# Altium PCB BMS_Rev4.PcbDoc (part 2 of 3)
Units mm, origin at the board's own origin, x right, y up, seen from the top; angles counter-clockwise.
Board outline 63.88 x 34.7 mm, 2 copper layers (Top Layer, Bottom Layer); 62 components, 39 nets, 215 pads, 192 vias.
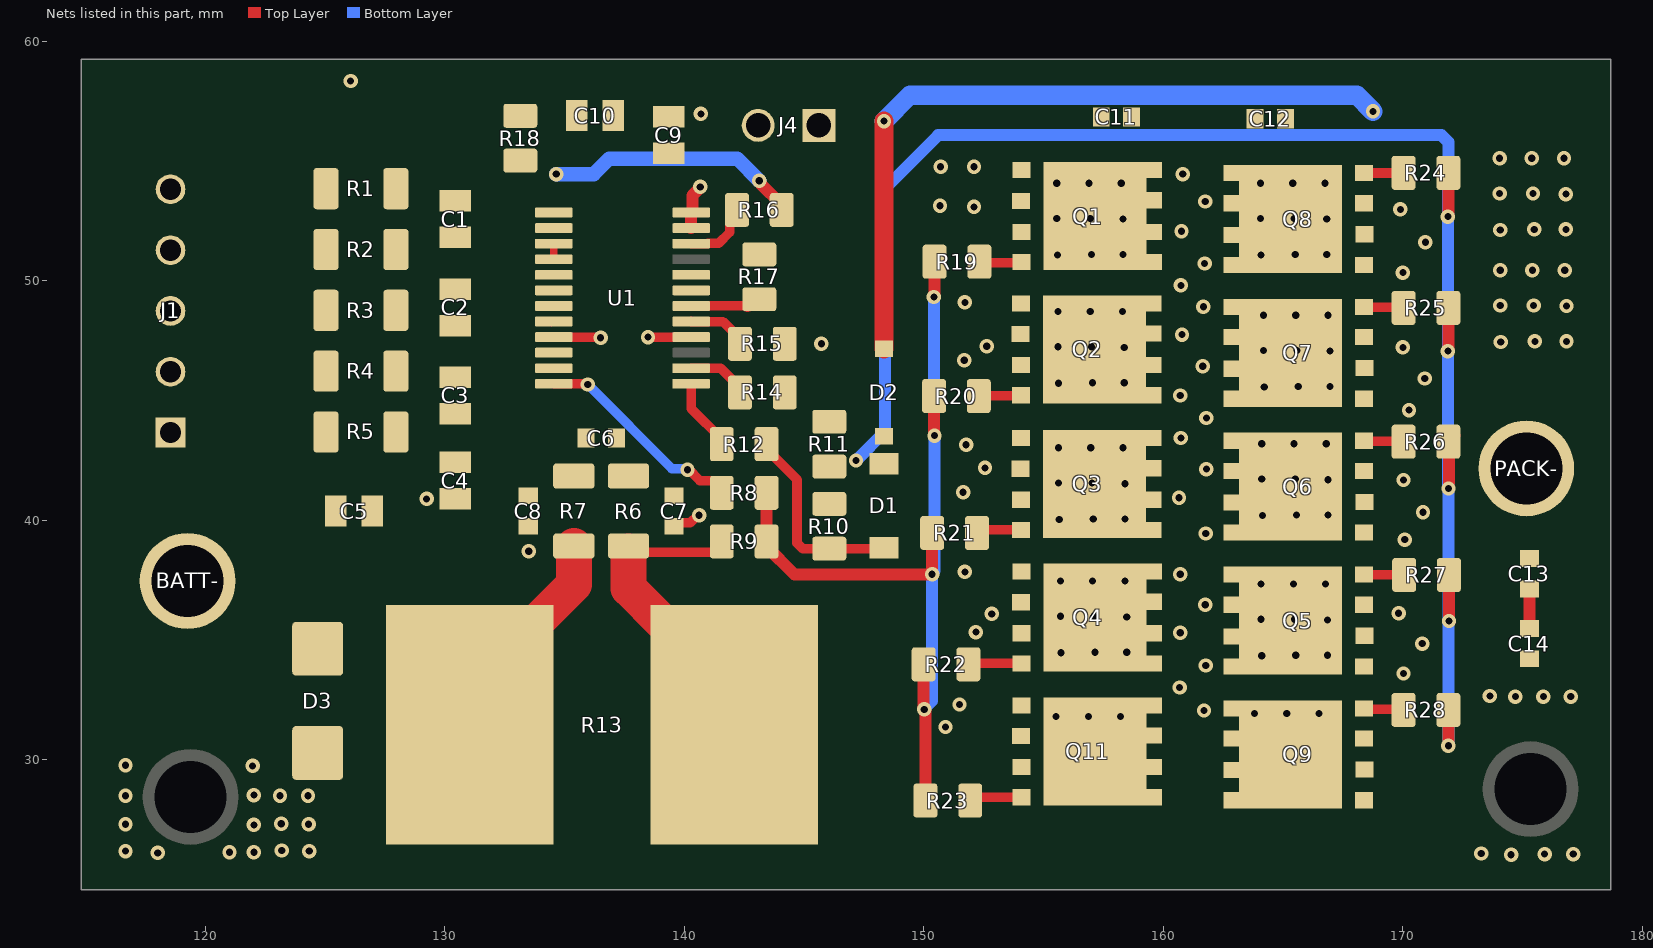
[diagram p2: the nets of this part, all layers, seen from the top]

## Components (designator, comment, footprint, x,y, rotation, side; value= is the part's Value field where it differs from the comment) (continued)
R4 "100R" RESC3115X65N 126.492,46.228 r0 top (schematic designator R5)
R5 "100R" RESC3115X65N 126.492,43.688 r0 top (schematic designator R19)
R6 "100R" RESC3115X65N 137.668,40.386 r90 top
R7 "100R" RESC3115X65N 135.382,40.386 r90 top
R8 "5.1K" RESISTOR0805 142.494,41.148 r180 top value=5.1kR
R9 "10M" RESISTOR0805 142.494,39.116 r0 top
R10 "1M" RESISTOR0805 146.05,39.751 r270 top value=1MR
R11 "3M" RESISTOR0805 146.05,43.18 r270 top value=3MR
R12 "5.1K" RESISTOR0805 142.494,43.18 r0 top value=5.1kR
R13 "0.2mOhm,7W" CSR 136.627,31.725 r0 top value=0.2mR
R14 "470K" RESISTOR0805 143.256,45.339 r180 top value=47kR
R15 "750K" RESISTOR0805 143.256,47.371 r0 top value=750kR
R16 "10K" RESISTOR0805 143.129,52.959 r0 top value=10kR
R17 "10K" RESISTOR0805 143.129,50.165 r90 top value=10kR
R18 "1K" RESISTOR0805 133.147,55.956 r90 top value=10kR
R19 "120R" RESISTOR0805 151.384,50.8 r0 top (schematic designator R31)
R20 "120R" RESISTOR0805 151.359,45.187 r0 top
R21 "120R" RESISTOR0805 151.282,39.472 r0 top
R22 "120R" RESISTOR0805 150.927,33.985 r0 top
R23 "120R" RESISTOR0805 151.003,28.296 r0 top
R24 "120R" RESISTOR0805 170.967,54.508 r0 top (schematic designator R25)
R25 "120R" RESISTOR0805 170.967,48.87 r0 top (schematic designator R26)
R26 "120R" RESISTOR0805 170.967,43.282 r0 top (schematic designator R27)
R27 "120R" RESISTOR0805 170.993,37.719 r0 top (schematic designator R28)
R28 "120R" RESISTOR0805 170.967,32.08 r0 top (schematic designator R29)
U1 "BQ7791501PWR" BQ77915 137.414,49.276 r0 top

## Footprints (in the part's own frame and the unit in brackets; to place one, negate y for a bottom-side part, rotate by r counter-clockwise, add the part's x,y. Pads: shape width x height; smd on the part's side, far side on the other; paste and mask are expansions set on the pad)
"6 pin header" [mm]
  rect 1.24x1.24 hole 0.89: J1_1(0,0)
  round 1.24 hole 0.89: J1_2(2.54,0) J1_3(5.08,0) J1_4(7.62,0) J1_5(10.16,0)
  silkscreen extent -2.1,-1.2 12.45,1.2, body extent -2.37,-2.35 12.53,3.4, height 6.51
BQ77915 [mm]
  rrect25% 1.57x0.41 smd: 1(-2.87,3.575) 2(-2.87,2.925) 3(-2.87,2.275) 4(-2.87,1.625) 5(-2.87,0.975) 6(-2.87,0.325) 7(-2.87,-0.325) 8(-2.87,-0.975) 9(-2.87,-1.625) 10(-2.87,-2.275) 11(-2.87,-2.925) 12(-2.87,-3.575) 13(2.87,-3.575) 14(2.87,-2.925) 15(2.87,-2.275) 16(2.87,-1.625) 17(2.87,-0.975) 18(2.87,-0.325) 19(2.87,0.325) 20(2.87,0.975) 21(2.87,1.625) 22(2.87,2.275) 23(2.87,2.925) 24(2.87,3.575)
  silkscreen extent -4.54,-4.1 2.2,4.1, body extent -3.2,-3.9 3.2,3.9, height 1.2
CSR [mm]
  rect 7x10 smd: 1(-5.588,-0.254) 2(5.461,-0.254)
  body extent -7.75,-4 7.49,4, height 1.45
DIODE(SOD) [mm]
  rect 0.9x1.2 smd: 1(-1.778,0) 2(1.725,0)
  silkscreen extent -2.12,-1 1.4,1.05, body extent -1.78,-0.9 1.82,0.9, height 1.11
DIOM5336X250N [mm]
  rrect15% 2.25x2.13 smd: 1(-2.175,0) 2(2.175,0)
  silkscreen extent -4.4,-1.45 2.65,1.45, body extent -2.65,-1.81 2.65,1.81, height 2.5
HEADER(4PIN) [mm]
  rect 1.37x1.37 / inner round 1.37 / far side rect 1.37x1.37 hole 1.02: 01(1.143,0)
  round 1.37 hole 1.02: 02(-1.397,0)
  silkscreen extent -2.67,-1.27 3.16,1.27, body extent -2.67,-1.35 2.41,1.14, height 11.32
MOSFET_CSD19531Q5A [mm]
  rect 4.295x4.51 smd paste-3: 9(0.301,0)
  rect 0.655x0.675 smd paste-1: D(2.776,-1.917) D(2.776,-0.66) D(2.776,0.66) D(2.776,1.917)
  rect 0.75x0.675 smd paste-1: G(-2.776,-1.917) S(-2.794,0.635) S(-2.776,-0.66) S(-2.776,1.917)
  silkscreen extent -3.63,1.87 -3.53,1.97, body extent -3,-2.36 3,2.54, height 1.11
PADSPACK#1 [mm]
  round 4 hole 3: BATT+(-1.27,-0.381)
PADSPACK#2 [mm]
  round 4 hole 3: 4(-1.27,-0.381)
RESC3115X65N [mm]
  rrect25% 1.05x1.72 smd: 1(-1.46,0) 2(1.46,0)
  body extent -1.6,-0.67 1.6,0.92, height 1
RESISTOR0805 [mm]
  rrect25% 1x1.42 smd: 1(-0.935,0) 2(0.935,0)
  silkscreen extent -0.12,-0.63 0.12,0.63, body extent -1,-0.63 1,0.63, height 0.65
WCAP-CSGP_0603_L1.6W0.8H0.8_WAVE [mm] "Ceramic Capacitors, 0603, body 1.6x0.8mm"
  rect 0.7x0.8 smd: 1(-0.635,0) 2(0.635,0)
  body extent -0.8,-0.4 0.8,0.4, height 0.8
WCAP-CSGP_0805_L2W1.25H0.6_WAVE [mm] "Ceramic Capacitors, body 2x1.25mm"
  rect 0.9x1.3 smd: 1(-0.762,0) 2(0.762,0)
  body extent -1,-0.63 1,0.63, height 0.6
ZENER(SOD123) [mm] "SODFL, 2-Leads, Body 1.60x3.71mm, IPC Medium Density"
  rect 0.7x0.75 smd: 1(-1.825,0) 2(1.825,0)
  silkscreen extent -2.12,-0.9 1.4,0.9, body extent -1.93,-0.9 1.93,0.9, height 1.35

## Part data
C1 C2 C3 C4 C5 C9 C10: library part C1u0805, "Ceramic Capacitor, Multilayer, Ceramic, 16V, 10% +Tol, 10% -Tol, X7R, 15% TC, 1uF, Surface Mount, 0805", Capacitor Type=Ceramic, Case/Package=0805, Manufacturer="Walsin Technologies", Manufacturer Part Number=0805B105K160CT, Max Operating Temperature=125°C, Min Operating Temperature=-55°C, Package Shape=Rectangular, Package Style=SMTMeter, Rated DC Voltage (URdc)=16V, Supplier Part Number=1292-0805B105K160CT-ND, Temperature Characteristics Code=X7R, Tolerance  (fill in as +-)=10%, Category="Ceramic Capacitors", ComponentLink1Description=https://datasheet.ciiva.com:443/pdfs/VipMasterIC/IC/WATC/WATC-S-A0009550342/WATC-S-A0009550342-1.pdf?src-supplier=IHS+Markit, ComponentLink1URL=https://datasheet.ciiva.com:443/pdfs/VipMasterIC/IC/WATC/WATC-S-A0009550342/WATC-S-A0009550342-1.pdf?src-supplier=IHS+Markit, ComponentLink2Description=http://www.farnell.com/datasheets/2340522.pdf?src-supplier=Farnell, ComponentLink2URL=http://www.farnell.com/datasheets/2340522.pdf?src-supplier=Farnell, ComponentLink3Description=https://datasheet.octopart.com/0805B105K160CT-Walsin-Technologies-datasheet-128065749.pdf?src-supplier=Future+Electronics, ComponentLink3URL=https://datasheet.octopart.com/0805B105K160CT-Walsin-Technologies-datasheet-128065749.pdf?src-supplier=Future+Electronics, ComponentLink4Description=https://datasheet.octopart.com/0805B105K160CT-Walsin-Technologies-datasheet-85392065.pdf?src-supplier=Element14, ComponentLink4URL=https://datasheet.octopart.com/0805B105K160CT-Walsin-Technologies-datasheet-85392065.pdf?src-supplier=Element14, ComponentLink5Description=https://www.verical.com/server-webapp/html/getDatasheet?partID=137112&src-supplier=Verical, ComponentLink5URL=https://www.verical.com/server-webapp/html/getDatasheet?partID=137112&src-supplier=Verical, ComponentLink6Description=https://datasheet.octopart.com/0805B105K160CT-Walsin-Technologies-datasheet-62066062.pdf?src-supplier=TME, ComponentLink6URL=https://datasheet.octopart.com/0805B105K160CT-Walsin-Technologies-datasheet-62066062.pdf?src-supplier=TME, ComponentLink7Description=https://datasheet.octopart.com/0805B105K160CT-Walsin-Technologies-datasheet-136037192.pdf?src-supplier=TECHDesign, ComponentLink7URL=https://datasheet.octopart.com/0805B105K160CT-Walsin-Technologies-datasheet-136037192.pdf?src-supplier=TECHDesign, Dielectric Material=Ceramic, Height=1.25mm, JESD-609 Code=e3, Length=2mm, Mounting Technology="Surface Mount", Multilayer=Yes, Packaging="Tape and Reel", Pins=2, Pricing="1=0.1, 10=0.05, 100=0.0295, 1000=0.01909 (USD)", Reach SVHC Compliant=Yes, RoHS=Yes, RoHS Compliant=Yes, Stock=4261, Supplier=Digikey, Terminal Finish=Nickel, Termination=Wraparound, Tolerance (fill in as +-)=10%, Width=1.25mm
C6 C7 C8 C11 C12 C13 C14: library part C0.1uF0603, "Ceramic Capacitor, Multilayer, Ceramic, 16V, 10% +Tol, 10% -Tol, X7R, 15% TC, 0.1uF, Surface Mount, 0603", Capacitor Type=Ceramic, Case/Package=0603, Manufacturer=Yageo, Manufacturer Part Number=CC0603KRX7R7BB104, Max Operating Temperature=125°C, Min Operating Temperature=-55°C, Package Shape=Rectangular, Package Style=SMTMeter, Rated DC Voltage (URdc)=16V, Supplier Part Number=2938116, Temperature Characteristics Code=X7R, Tolerance  (fill in as +-)=10%, Category="Ceramic Capacitors", ComponentLink1Description=https://datasheet.ciiva.com:443/pdfs/VipMasterIC/IC/YAGO/YAGO-S-A0003557223/YAGO-S-A0003557223-1.pdf?src-supplier=IHS+Markit, ComponentLink1URL=https://datasheet.ciiva.com:443/pdfs/VipMasterIC/IC/YAGO/YAGO-S-A0003557223/YAGO-S-A0003557223-1.pdf?src-supplier=IHS+Markit, ComponentLink2Description=https://datasheet.ciiva.com/11786/0900766b80d84f1d-11786077.pdf?src-supplier=Rs, ComponentLink2URL=https://datasheet.ciiva.com/11786/0900766b80d84f1d-11786077.pdf?src-supplier=Rs, ComponentLink3Description=https://datasheet.ciiva.com/8033/70765-8033799.pdf?src-supplier=Element14, ComponentLink3URL=https://datasheet.ciiva.com/8033/70765-8033799.pdf?src-supplier=Element14, ComponentLink4Description=https://datasheet.ciiva.com/7978/1489800-7978141.pdf?src-supplier=Element14, ComponentLink4URL=https://datasheet.ciiva.com/7978/1489800-7978141.pdf?src-supplier=Element14, ComponentLink5Description=https://datasheet.ciiva.com/28450/1489800-28450552.pdf?src-supplier=Element14, ComponentLink5URL=https://datasheet.ciiva.com/28450/1489800-28450552.pdf?src-supplier=Element14, ComponentLink6Description=https://datasheet.ciiva.com/46430/1734573-46430156.pdf?src-supplier=Element14, ComponentLink6URL=https://datasheet.ciiva.com/46430/1734573-46430156.pdf?src-supplier=Element14, ComponentLink7Description=https://datasheet.ciiva.com/144/mlccorderingcode-144183.pdf?src-supplier=Digikey, ComponentLink7URL=https://datasheet.ciiva.com/144/mlccorderingcode-144183.pdf?src-supplier=Digikey, ComponentLink8Description=https://datasheet.ciiva.com/144/mlccorderingcode-144182.pdf?src-supplier=Digikey, ComponentLink8URL=https://datasheet.ciiva.com/144/mlccorderingcode-144182.pdf?src-supplier=Digikey, ComponentLink9Description=https://datasheet.ciiva.com/144/mlccorderingcode-144184.pdf?src-supplier=Digikey, ComponentLink9URL=https://datasheet.ciiva.com/144/mlccorderingcode-144184.pdf?src-supplier=Digikey, ComponentLink10Description=https://datasheet.ciiva.com/8033/1734573-8033797.pdf?src-supplier=Element14, ComponentLink10URL=https://datasheet.ciiva.com/8033/1734573-8033797.pdf?src-supplier=Element14, ComponentLink11Description=https://datasheet.ciiva.com/13395/upy-gphc-x7r-6-3v-to-50v-8-13395674.pdf?src-supplier=Mouser, ComponentLink11URL=https://datasheet.ciiva.com/13395/upy-gphc-x7r-6-3v-to-50v-8-13395674.pdf?src-supplier=Mouser, ComponentLink12Description=https://datasheet.ciiva.com/11464/upy-gphc-x7r-6-3v-to-50v-8-11464735.pdf?src-supplier=Avnet, ComponentLink12URL=https://datasheet.ciiva.com/11464/upy-gphc-x7r-6-3v-to-50v-8-11464735.pdf?src-supplier=Avnet, ComponentLink13Description=https://datasheet.ciiva.com/15165/getdatasheetpartid-63554-15165387.pdf?src-supplier=Verical, ComponentLink13URL=https://datasheet.ciiva.com/15165/getdatasheetpartid-63554-15165387.pdf?src-supplier=Verical, Dielectric Material=Ceramic, Height=0.8mm, JESD-609 Code=e3, Length=1.6mm, Mounting Technology="Surface Mount", Multilayer=Yes, Packaging="Tape and Reel", Pins=2, Pricing="4000=0.0024, 16000=0.0023, 40000=0.0022, 100000=0.0022, 160000=0.0021 (USD)", Reach SVHC Compliant=Yes, RoHS=Yes, RoHS Compliant=Yes, Stock=532000, Supplier="Future Electronics", Terminal Finish=Nickel, Termination=Wraparound, Tolerance (fill in as +-)=10%, Width=0.8mm
D1: library part 1N4007SOD123, "Standard Rectifier 1000V SOD-123", Manufacturer="Sangdest Microelectronics", Manufacturer Part Number=1N4007FL, Category="Rectifier Diodes", Pricing="1=0.13, 10=0.08, 100=0.0493, 500=0.03562, 1000=0.03116 (USD)", RoHS=No, Stock=340272, Supplier=Digikey, Supplier Part Number=1655-1N4007FLCT-ND
D2: library part Zener16V, "Zener Diode, 16V V(Z), 5%, 0.5W, Silicon, Unidirectional", Manufacturer="ON Semiconductor", Max Operating Temperature=150°C, Max Power Dissipation=500mW, Min Operating Temperature=-55°C, Package Body Material=Plastic, Package Shape=Rectangular, Package Style="SMALL OUTLINEMeter", Reference Voltage-Nom=16V, Test Current=7.8mA, Voltage Tol-Max=5%, Category="Zener Diodes", ComponentLink1Description=https://datasheet.ciiva.com:443/pdfs/VipMasterIC/IC/ONSM/ONSM-S-A0008364085/ONSM-S-A0008364085-1.pdf?src-supplier=IHS+Markit, ComponentLink1URL=https://datasheet.ciiva.com:443/pdfs/VipMasterIC/IC/ONSM/ONSM-S-A0008364085/ONSM-S-A0008364085-1.pdf?src-supplier=IHS+Markit, ComponentLink2Description=https://datasheet.ciiva.com/10638/mmsz5221bt1-d-10638284.pdf?src-supplier=Avnet, ComponentLink2URL=https://datasheet.ciiva.com/10638/mmsz5221bt1-d-10638284.pdf?src-supplier=Avnet, ComponentLink3Description=https://datasheet.ciiva.com/900/mmsz5221bt1-d-900242.pdf?src-supplier=Digikey, ComponentLink3URL=https://datasheet.ciiva.com/900/mmsz5221bt1-d-900242.pdf?src-supplier=Digikey, Diode Element Material=SILICON, Diode Type=ZENER, Dynamic Impedance-Max=17R, JESD-30 Code=R-PDSO-G2, JESD-609 Code=e3, Manufacturer Part Number=SZMMSZ5246BT1G, Moisture Sensitivity Level=1, Number of Elements=1, Pins=2, Polarity=Unidirectional, Pricing="1=0.126, 10=0.0807, 100=0.0626, 500=0.0611, 1000=0.0597, 3000=0.0399, 6000=0.0386 (USD)", Reach SVHC Compliant=Yes, Reference Standard=AEC-Q101, RoHS=Yes, RoHS Compliant=Yes, Stock=21000, Supplier="Arrow Electronics", Supplier Part Number=SZMMSZ5246BT1G, Surface Mount=Yes, Technology=ZENER, Terminal Finish=Tin, Terminal Form="Gull Wing", Terminal Position=DUAL
D3: library part Diode(26V), "Trans Voltage Suppressor Diode, 600W, 26V V(RWM), Unidirectional, 1 Element, Silicon", Breakdown Voltage-Nom=31.05V, Clamping Voltage-Max=42.1V, Manufacturer=Diodes, Manufacturer Part Number=SMBJ26A-13-F, Max Breakdown Voltage=33.2V, Max Operating Temperature=150°C, Max Power Dissipation=5W, Min Breakdown Voltage=28.9V, Min Operating Temperature=-55°C, Non-rep Peak Rev Power Dis-Max=600W, Package Body Material=Plastic, Package Shape=Rectangular, Package Style="SMALL OUTLINEMeter", Peak Reflow Temperature (Cel)=260°C, Rep Pk Reverse Voltage-Max=26V, Time @ Peak Reflow Temperature-Max (s)=40s, Additional Feature="EXCELLENT CLAMPING CAPABILITY", Category="TVS Diodes", ComponentLink1Description=https://datasheet.ciiva.com:443/pdfs/VipMasterIC/IC/DIOD/DIOD-S-A0003133144/DIOD-S-A0003133144-1.pdf?src-supplier=IHS+Markit, ComponentLink1URL=https://datasheet.ciiva.com:443/pdfs/VipMasterIC/IC/DIOD/DIOD-S-A0003133144/DIOD-S-A0003133144-1.pdf?src-supplier=IHS+Markit, ComponentLink2Description=http://www.mouser.com/ds/2/115/ds19002-13254.pdf?src-supplier=Mouser, ComponentLink2URL=http://www.mouser.com/ds/2/115/ds19002-13254.pdf?src-supplier=Mouser, ComponentLink3Description=https://datasheet.octopart.com/SMBJ26A-13-F-Diodes-Inc.-datasheet-4062.pdf?src-supplier=Digikey, ComponentLink3URL=https://datasheet.octopart.com/SMBJ26A-13-F-Diodes-Inc.-datasheet-4062.pdf?src-supplier=Digikey, ComponentLink4Description=https://www.diodes.com/assets/Datasheets/ds19002.pdf?src-supplier=Digikey, ComponentLink4URL=https://www.diodes.com/assets/Datasheets/ds19002.pdf?src-supplier=Digikey, ComponentLink5Description=http://components.arrow.com/part/dataview/41509992S7614743N2867?src-supplier=Arrow+Electronics, ComponentLink5URL=http://components.arrow.com/part/dataview/41509992S7614743N2867?src-supplier=Arrow+Electronics, ComponentLink6Description=http://www.diodes.com//datasheets/ds19002.pdf?src-supplier=Avnet, ComponentLink6URL=http://www.diodes.com//datasheets/ds19002.pdf?src-supplier=Avnet, ComponentLink7Description=http://www.diodes.com///datasheets/ds19002.pdf?src-supplier=Avnet, ComponentLink7URL=http://www.diodes.com///datasheets/ds19002.pdf?src-supplier=Avnet, ComponentLink8Description=https://datasheet.octopart.com/SMBJ26A-13-F-Diodes-Inc.-datasheet-103923734.pdf?src-supplier=Farnell, ComponentLink8URL=https://datasheet.octopart.com/SMBJ26A-13-F-Diodes-Inc.-datasheet-103923734.pdf?src-supplier=Farnell, Diode Element Material=SILICON, Diode Type="TRANS VOLTAGE SUPPRESSOR", JESD-30 Code=R-PDSO-C2, JESD-609 Code=e3, Moisture Sensitivity Level=1, Number of Elements=1, Pins=2, Polarity=Unidirectional, Pricing="43=0.1066 (USD)", Qualification Status="Not Qualified", Reach SVHC Compliant=No, RoHS=Yes, RoHS Compliant=Yes, Stock=43, Supplier="Arrow Electronics", Supplier Part Number=SMBJ26A-13-F, Surface Mount=Yes, Technology=AVALANCHE, Terminal Finish=Tin, Terminal Form="C BEND", Terminal Position=DUAL
J4: library part Header(4Pin)
Q1 Q2 Q3 Q4 Q5 Q6 Q7 Q8 Q9 Q11: library part "Power Mosfet", "Power Field-Effect Transistor, 100A I(D), 30V, 0.0078ohm, 1-Element, N-Channel, Silicon, Metal-oxide Semiconductor FET", Avalanche Energy Rating (Eas)=168mJ, Case Connection=DRAIN, Drain Current-Max (Abs) (ID)=100A, Drain-source On Resistance-Max=7.8mR, DS Breakdown Voltage-Min=30V, Manufacturer="Texas Instruments", Max Operating Temperature=150°C, Operating Mode="ENHANCEMENT MODE", Package Body Material=Plastic, Package Shape=Rectangular, Package Style="SMALL OUTLINEMeter", Peak Reflow Temperature (Cel)=260°C, Power Dissipation-Max (Abs)=3.1W, Pulsed Drain Current-Max (IDM)=134A, Supplier Part Number=595-CSD17310Q5A, Category="Integrated Circuits (ICs)", ComponentLink1Description=https://www.ti.com:443/lit/ds/symlink/csd17310q5a.pdf?src-supplier=IHS+Markit, ComponentLink1URL=https://www.ti.com:443/lit/ds/symlink/csd17310q5a.pdf?src-supplier=IHS+Markit, ComponentLink2Description=https://datasheet.ciiva.com/938/csd17310q5a-938736.pdf?src-supplier=Digikey, ComponentLink2URL=https://datasheet.ciiva.com/938/csd17310q5a-938736.pdf?src-supplier=Digikey, ComponentLink3Description=https://datasheet.ciiva.com/14423/slps255a-14423506.pdf?src-supplier=Avnet, ComponentLink3URL=https://datasheet.ciiva.com/14423/slps255a-14423506.pdf?src-supplier=Avnet, ComponentLink4Description=https://datasheet.ciiva.com/4440/slps255a-128076-4440500.pdf?src-supplier=Mouser, ComponentLink4URL=https://datasheet.ciiva.com/4440/slps255a-128076-4440500.pdf?src-supplier=Mouser, ComponentLink5Description=https://datasheet.ciiva.com/7968/1788987-7968276.pdf?src-supplier=Element14, ComponentLink5URL=https://datasheet.ciiva.com/7968/1788987-7968276.pdf?src-supplier=Element14, ComponentLink6Description=https://datasheet.ciiva.com/938/csd17310q5a-938737.pdf?src-supplier=Digikey, ComponentLink6URL=https://datasheet.ciiva.com/938/csd17310q5a-938737.pdf?src-supplier=Digikey, ComponentLink7Description=https://datasheet.ciiva.com/938/csd17310q5a-938738.pdf?src-supplier=Digikey, ComponentLink7URL=https://datasheet.ciiva.com/938/csd17310q5a-938738.pdf?src-supplier=Digikey, ComponentLink8Description=https://datasheet.ciiva.com/5751/csd17310q5a-5751786.pdf?src-supplier=Farnell, ComponentLink8URL=https://datasheet.ciiva.com/5751/csd17310q5a-5751786.pdf?src-supplier=Farnell, ComponentLink9Description=https://datasheet.ciiva.com/14192/slps255a-14192902.pdf?src-supplier=Avnet, ComponentLink9URL=https://datasheet.ciiva.com/14192/slps255a-14192902.pdf?src-supplier=Avnet, Drain Current-Max (ID)=100A, FET Technology="METAL-OXIDE SEMICONDUCTOR", JESD-609 Code=e3, Manufacturer Part Number=CSD17310Q5A, Moisture Sensitivity Level=1, Number of Elements=1, Pins=5, Polarity/Channel Type=N-CHANNEL, Pricing="1=0.55, 10=0.537, 50=0.537, 100=0.478, 1000=0.403, 10000=0.361 (USD)", Qualification Status="Not Qualified", Reach SVHC Compliant=No, RoHS=Yes, RoHS Compliant=Yes, Stock=5509, Supplier=Mouser, Surface Mount=Yes, Terminal Finish=Tin, Terminal Form="No Lead", Terminal Position=DUAL, Transistor Application=SWITCHING, Transistor Element Material=SILICON
R1 R2 R3 R4 R5 R6 R7: library part 100R1206, "Fixed Resistor, Metal Foil, 0.25W, 100ohm, 79V, 0.02% +/-Tol, 0.2ppm/Cel, Surface Mount, 1206", Case/Package=1206, Manufacturer="Vishay Precision Group", Manufacturer Part Number=Y1630100R000Q9R, Manufacturer Series=VFCP, Max Operating Temperature=150°C, Min Operating Temperature=-55°C, Package Height=0.64mm, Package Length=3.2mm, Package Shape=Rectangular, Package Width=1.57mm, Power=250mW, Rated Temperature=70°C, Resistor Type="FIXED RESISTOR", Temperature Coefficient (ppm/Cel)=.2, Tolerance=0.02%, Working Voltage=79V, Category="Chip SMD Resistors", ComponentLink1Description=https://datasheet.ciiva.com:443/pdfs/VipMasterIC/IC/VIPG/VIPG-S-A0001709419/VIPG-S-A0001709419-1.pdf?src-supplier=IHS+Markit, ComponentLink1URL=https://datasheet.ciiva.com:443/pdfs/VipMasterIC/IC/VIPG/VIPG-S-A0001709419/VIPG-S-A0001709419-1.pdf?src-supplier=IHS+Markit, ComponentLink2Description=https://datasheet.ciiva.com/29710/vfcpseri-29710815.pdf?src-supplier=Digikey, ComponentLink2URL=https://datasheet.ciiva.com/29710/vfcpseri-29710815.pdf?src-supplier=Digikey, ComponentLink3Description=https://datasheet.ciiva.com/25647/vfcpseri-25647597.pdf?src-supplier=Digikey, ComponentLink3URL=https://datasheet.ciiva.com/25647/vfcpseri-25647597.pdf?src-supplier=Digikey, ComponentLink4Description=https://datasheet.ciiva.com/18609/vfcpseri-18609260.pdf?src-supplier=Digikey, ComponentLink4URL=https://datasheet.ciiva.com/18609/vfcpseri-18609260.pdf?src-supplier=Digikey, Construction=Rectangular, JESD-609 Code=e1, Mounting Technology="Surface Mount", Packaging="Tape and Reel", Pins=2, Pricing="100=9.3023, 200=9.1665, 400=9.0307, 600=5.3841, 800=5.2374 (USD)", Reach SVHC Compliant=Yes, RoHS=Yes, RoHS Compliant=Yes, Supplier=Avnet, Supplier Part Number=Y1630100R000Q9R, Technology="METAL FOIL", Terminal Finish=Copper, Termination="One Surface"
R8 R12: library part 5.1K0805, "Fixed Resistor, Metal Glaze/thick Film, 0.125W, 5100ohm, 150V, 5% +/-Tol, 200ppm/Cel, Surface Mount, 0805", Case/Package=0805, Manufacturer="Stackpole Electronics", Manufacturer Part Number=RMCF0805JT5K10, Max Operating Temperature=155°C, Min Operating Temperature=-55°C, Package Height=0.5mm, Package Length=2mm, Package Shape=Rectangular, Package Width=1.25mm, Power=125mW, Rated Temperature=70°C, Resistor Type="FIXED RESISTOR", Supplier Part Number=RMCF0805JT5K10CT-ND, Temperature Coefficient (ppm/Cel)=200, Tolerance=5%, Working Voltage=150V, Category="Chip SMD Resistors", ComponentLink1Description=https://datasheet.ciiva.com:443/pdfs/VipMasterIC/IC/SEIE/SEIE-S-A0009541969/SEIE-S-A0009541969-1.pdf?src-supplier=IHS+Markit, ComponentLink1URL=https://datasheet.ciiva.com:443/pdfs/VipMasterIC/IC/SEIE/SEIE-S-A0009541969/SEIE-S-A0009541969-1.pdf?src-supplier=IHS+Markit, ComponentLink2Description=https://datasheet.ciiva.com/15193/getdatasheetpartid-707422-15193654.pdf?src-supplier=Verical, ComponentLink2URL=https://datasheet.ciiva.com/15193/getdatasheetpartid-707422-15193654.pdf?src-supplier=Verical, Construction=Rectangular, JESD-609 Code=e3, Mounting Technology="Surface Mount", Packaging="Tape and Reel", Pins=2, Pricing="1=0.1, 10=0.022, 50=0.0126, 100=0.0101, 500=0.00644, 1000=0.00542 (USD)", Reach SVHC Compliant=Yes, Reference Standard=AEC-Q200, RoHS=Yes, RoHS Compliant=Yes, Stock=398574, Supplier=Digikey, Technology="METAL GLAZE/THICK FILM", Terminal Finish=Nickel, Termination=Wraparound
R10: library part 1M0805, "Fixed Resistor, Thin Film, 0.125W, 1000000ohm, 150V, 0.1% +/-Tol, 25ppm/Cel, Surface Mount, 0805", Case/Package=0805, Manufacturer=Susumu, Manufacturer Part Number=RG2012P-105-B-T5, Max Operating Temperature=155°C, Min Operating Temperature=-55°C, Package Height=0.4mm, Package Length=2mm, Package Width=1.25mm, Power=250mW, Rated Temperature=70°C, Resistor Type="FIXED RESISTOR", Supplier Part Number=408-RG2012P-105-B-T5CT-ND, Temperature Coefficient (ppm/Cel)=25, Tolerance=0.1%, Working Voltage=150V, Additional Feature="ANTI-SULFUR, PRECISION", Category="Chip SMD Resistors", ComponentLink1Description=https://datasheet.ciiva.com:443/pdfs/VipMasterIC/IC/SUSU/SUSU-S-A0004582566/SUSU-S-A0004582566-1.pdf?src-supplier=IHS+Markit, ComponentLink1URL=https://datasheet.ciiva.com:443/pdfs/VipMasterIC/IC/SUSU/SUSU-S-A0004582566/SUSU-S-A0004582566-1.pdf?src-supplier=IHS+Markit, ComponentLink2Description=https://media.digikey.com/pdf/Data%20Sheets/Susumu%20PDFs/RG_RM_RGH_Oct2012.pdf?src-supplier=Digikey, ComponentLink2URL=https://media.digikey.com/pdf/Data%20Sheets/Susumu%20PDFs/RG_RM_RGH_Oct2012.pdf?src-supplier=Digikey, ComponentLink3Description=http://www.mouser.com/ds/2/392/n_catalog_partition01_en-1140338.pdf?src-supplier=Mouser, ComponentLink3URL=http://www.mouser.com/ds/2/392/n_catalog_partition01_en-1140338.pdf?src-supplier=Mouser, ComponentLink4Description=https://4donline.ihs.com/images/VipMasterIC/IC/SUSU/SUSU-S-A0004582566/SUSU-S-A0004582566-1.pdf?hkey=52A5661711E402568146F3353EA87419&src-supplier=Newark, ComponentLink4URL=https://4donline.ihs.com/images/VipMasterIC/IC/SUSU/SUSU-S-A0004582566/SUSU-S-A0004582566-1.pdf?hkey=52A5661711E402568146F3353EA87419&src-supplier=Newark, ComponentLink5Description=http://www.susumu.co.jp/common/pdf/n_catalog_partition01_en.pdf?src-supplier=Digikey, ComponentLink5URL=http://www.susumu.co.jp/common/pdf/n_catalog_partition01_en.pdf?src-supplier=Digikey, ComponentLink6Description=https://4donline.ihs.com/images/VipMasterIC/IC/SUSU/SUSU-S-A0004582566/SUSU-S-A0004582566-1.pdf?hkey=52A5661711E402568146F3353EA87419&src-supplier=Farnell, ComponentLink6URL=https://4donline.ihs.com/images/VipMasterIC/IC/SUSU/SUSU-S-A0004582566/SUSU-S-A0004582566-1.pdf?hkey=52A5661711E402568146F3353EA87419&src-supplier=Farnell, ComponentLink7Description=https://4donline.ihs.com/images/VipMasterIC/IC/SUSU/SUSU-S-A0004582566/SUSU-S-A0004582566-1.pdf?hkey=52A5661711E402568146F3353EA87419&src-supplier=Element14, ComponentLink7URL=https://4donline.ihs.com/images/VipMasterIC/IC/SUSU/SUSU-S-A0004582566/SUSU-S-A0004582566-1.pdf?hkey=52A5661711E402568146F3353EA87419&src-supplier=Element14, ComponentLink8Description=https://datasheet.octopart.com/RG2012P-105-B-T5-Susumu-datasheet-68296037.pdf?src-supplier=Future+Electronics, ComponentLink8URL=https://datasheet.octopart.com/RG2012P-105-B-T5-Susumu-datasheet-68296037.pdf?src-supplier=Future+Electronics, Construction=Rectangular, JESD-609 Code=e3, Mounting Technology="Surface Mount", Packaging="Tape and Reel", Pins=2, Pricing="1=0.12, 10=0.1, 50=0.0876, 100=0.0828, 500=0.07762, 1000=0.07201 (USD)", Reach SVHC Compliant=Yes, Reference Standard=AEC-Q200, RoHS=Yes, RoHS Compliant=Yes, Stock=88488, Supplier=Digikey, Technology="THIN FILM", Terminal Finish=Nickel, Termination=Wraparound
R11: library part 3M0805, "Fixed Resistor, Metal Glaze/thick Film, 0.125W, 3000000ohm, 150V, 5% +/-Tol, 100ppm/Cel, Surface Mount, 0805", Case/Package=0805, Manufacturer=Yageo, Manufacturer Part Number=RC0805JR-073ML, Max Operating Temperature=155°C, Min Operating Temperature=-55°C, Package Height=0.5mm, Package Length=2mm, Package Shape=Rectangular, Package Width=1.25mm, Power=125mW, Rated Temperature=70°C, Resistor Type="FIXED RESISTOR", Supplier Part Number=1166535, Temperature Coefficient (ppm/Cel)=100, Tolerance=5%, Working Voltage=150V, Additional Feature="LASER TRIMMABLE", Category="Chip SMD Resistors", ComponentLink1Description=https://datasheet.ciiva.com:443/pdfs/VipMasterIC/IC/YAGO/YAGO-S-A0008145938/YAGO-S-A0008145938-1.pdf?src-supplier=IHS+Markit, ComponentLink1URL=https://datasheet.ciiva.com:443/pdfs/VipMasterIC/IC/YAGO/YAGO-S-A0008145938/YAGO-S-A0008145938-1.pdf?src-supplier=IHS+Markit, ComponentLink2Description=https://datasheet.ciiva.com/2491/pyu-r-int-thick-7-2491360.pdf?src-supplier=Digikey, ComponentLink2URL=https://datasheet.ciiva.com/2491/pyu-r-int-thick-7-2491360.pdf?src-supplier=Digikey, ComponentLink3Description=https://datasheet.ciiva.com/2491/pyu-r-int-thick-7-2491361.pdf?src-supplier=Digikey, ComponentLink3URL=https://datasheet.ciiva.com/2491/pyu-r-int-thick-7-2491361.pdf?src-supplier=Digikey, ComponentLink4Description=https://datasheet.ciiva.com/2491/pyu-r-int-thick-7-2491362.pdf?src-supplier=Digikey, ComponentLink4URL=https://datasheet.ciiva.com/2491/pyu-r-int-thick-7-2491362.pdf?src-supplier=Digikey, ComponentLink5Description=https://datasheet.ciiva.com/17422/rc0805-17422951.pdf?src-supplier=Future+Electronics, ComponentLink5URL=https://datasheet.ciiva.com/17422/rc0805-17422951.pdf?src-supplier=Future+Electronics, Construction=Chip, JESD-609 Code=e3, Mounting Technology="Surface Mount", Packaging="Tape and Reel", Pins=2, Pricing="5000=0.0019, 20000=0.0019, 100000=0.0018, 200000=0.0017, 625000=0.0017 (USD)", Reach SVHC Compliant=Yes, RoHS=Yes, RoHS Compliant=Yes, Stock=225000, Supplier="Future Electronics", Technology="METAL GLAZE/THICK FILM", Terminal Finish=Nickel, Termination=Wraparound
R13: library part CSR, "Fixed Resistor, Metal Strip, 7W, 0.0002ohm, 0.0374V, 1% +/-Tol, 225ppm/Cel, Surface Mount, 5931", Case/Package=5931, Manufacturer=Yageo, Manufacturer Part Number=PU5931FKHP70U2L, Max Operating Temperature=170°C, Min Operating Temperature=-65°C, Package Length=15mm, Package Width=7.75mm, Power=7W, Rated Temperature=70°C, Resistor Type="FIXED RESISTOR", Supplier Part Number=YAG6135CT-ND, Temperature Coefficient (ppm/Cel)=225, Tolerance=1%, Category="Chip SMD Resistors", ComponentLink1Description=https://datasheet.ciiva.com:443/pdfs/VipMasterIC/IC/YAGO/YAGO-S-A0007059195/YAGO-S-A0007059195-1.pdf?src-supplier=IHS+Markit, ComponentLink1URL=https://datasheet.ciiva.com:443/pdfs/VipMasterIC/IC/YAGO/YAGO-S-A0007059195/YAGO-S-A0007059195-1.pdf?src-supplier=IHS+Markit, Construction=Molded, Mounting Technology="Surface Mount", Packaging="Tape and Reel", Pins=2, Pricing="1=2.31, 10=1.536, 25=1.3252, 50=1.1936, 100=1.0814, 250=0.9586, 500=0.88176 (USD)", Reach SVHC Compliant=Yes, Reference Standard=AEC-Q200, RoHS=Yes, RoHS Compliant=Yes, Stock=490, Supplier=Digikey, Technology="METAL STRIP", Termination="Gull Wing"
R14: "Fixed Resistor, Metal Glaze/thick Film, 0.125W, 470000ohm, 150V, 1% +/-Tol, 100ppm/Cel, Surface Mount, 0805", Case/Package=0805, Manufacturer=Yageo, Manufacturer Part Number=RC0805FR-0747KL, Max Operating Temperature=155°C, Min Operating Temperature=-55°C, Package Height=0.5mm, Package Length=2mm, Package Shape=Rectangular, Package Width=1.25mm, Power=125mW, Rated Temperature=70°C, Resistor Type="FIXED RESISTOR", Supplier Part Number=2357531, Temperature Coefficient (ppm/Cel)=100, Tolerance=1%, Working Voltage=150V, Additional Feature="LASER TRIMMABLE", Category="Chip SMD Resistors", ComponentLink1Description=https://datasheet.ciiva.com:443/pdfs/VipMasterIC/IC/YAGO/YAGO-S-A0008145938/YAGO-S-A0008145938-1.pdf?src-supplier=IHS+Markit, ComponentLink1URL=https://datasheet.ciiva.com:443/pdfs/VipMasterIC/IC/YAGO/YAGO-S-A0008145938/YAGO-S-A0008145938-1.pdf?src-supplier=IHS+Markit, ComponentLink2Description=https://datasheet.ciiva.com/46447/444164-46447581.pdf?src-supplier=Element14, ComponentLink2URL=https://datasheet.ciiva.com/46447/444164-46447581.pdf?src-supplier=Element14, ComponentLink3Description=https://datasheet.ciiva.com/7941/1686128-7941799.pdf?src-supplier=Element14, ComponentLink3URL=https://datasheet.ciiva.com/7941/1686128-7941799.pdf?src-supplier=Element14, ComponentLink4Description=https://datasheet.ciiva.com/7941/444164-7941800.pdf?src-supplier=Element14, ComponentLink4URL=https://datasheet.ciiva.com/7941/444164-7941800.pdf?src-supplier=Element14, ComponentLink5Description=https://datasheet.ciiva.com/7941/444164-7941801.pdf?src-supplier=Element14, ComponentLink5URL=https://datasheet.ciiva.com/7941/444164-7941801.pdf?src-supplier=Element14, ComponentLink6Description=https://datasheet.ciiva.com/16742/rc0805-16742265.pdf?src-supplier=Future+Electronics, ComponentLink6URL=https://datasheet.ciiva.com/16742/rc0805-16742265.pdf?src-supplier=Future+Electronics, ComponentLink7Description=https://datasheet.ciiva.com/12667/rc0805-12667926.pdf?src-supplier=Mouser, ComponentLink7URL=https://datasheet.ciiva.com/12667/rc0805-12667926.pdf?src-supplier=Mouser, Construction=Chip, JESD-609 Code=e3, Mounting Technology="Surface Mount", Packaging="Tape and Reel", Pins=2, Pricing="5000=0.0016, 25000=0.0015, 100000=0.0015, 250000=0.0014, 625000=0.0014 (USD)", Reach SVHC Compliant=Yes, RoHS=Yes, RoHS Compliant=Yes, Stock=360000, Supplier="Future Electronics", Technology="METAL GLAZE/THICK FILM", Terminal Finish=Nickel, Termination=Wraparound
R15: "Fixed Resistor, Metal Glaze/thick Film, 0.125W, 750000ohm, 150V, 1% +/-Tol, 100ppm/Cel, Surface Mount, 0805", Case/Package=0805, Manufacturer="Stackpole Electronics", Manufacturer Part Number=RMCF0805FT750K, Max Operating Temperature=155°C, Min Operating Temperature=-55°C, Package Height=0.5mm, Package Length=2mm, Package Shape=Rectangular, Package Width=1.25mm, Power=125mW, Rated Temperature=70°C, Resistor Type="FIXED RESISTOR", Supplier Part Number=RMCF0805FT750KCT-ND, Temperature Coefficient (ppm/Cel)=100, Tolerance=1%, Working Voltage=150V, Category="Chip SMD Resistors", ComponentLink1Description=https://datasheet.ciiva.com:443/pdfs/VipMasterIC/IC/SEIE/SEIE-S-A0009541969/SEIE-S-A0009541969-1.pdf?src-supplier=IHS+Markit, ComponentLink1URL=https://datasheet.ciiva.com:443/pdfs/VipMasterIC/IC/SEIE/SEIE-S-A0009541969/SEIE-S-A0009541969-1.pdf?src-supplier=IHS+Markit, ComponentLink2Description=http://components.arrow.com/part/dataview/40964641S7404118N1174?src-supplier=Arrow+Electronics, ComponentLink2URL=http://components.arrow.com/part/dataview/40964641S7404118N1174?src-supplier=Arrow+Electronics, ComponentLink3Description=https://www.verical.com/server-webapp/html/getDatasheet?partID=494680&src-supplier=Verical, ComponentLink3URL=https://www.verical.com/server-webapp/html/getDatasheet?partID=494680&src-supplier=Verical, ComponentLink4Description=https://www.seielect.com/catalog/sei-rmcf_rmcp.pdf?src-supplier=Digikey, ComponentLink4URL=https://www.seielect.com/catalog/sei-rmcf_rmcp.pdf?src-supplier=Digikey, ComponentLink5Description=https://www.seielect.com/catalog/SEI-Packaging.pdf?src-supplier=Digikey, ComponentLink5URL=https://www.seielect.com/catalog/SEI-Packaging.pdf?src-supplier=Digikey, ComponentLink6Description=https://www.seielect.com/catalog/SEI-RMCF_RMCP.pdf?src-supplier=Avnet, ComponentLink6URL=https://www.seielect.com/catalog/SEI-RMCF_RMCP.pdf?src-supplier=Avnet, ComponentLink7Description=https://datasheet.octopart.com/RMCF0805FT750K-Stackpole-Electronics-datasheet-141193804.pdf?src-supplier=Master+Electronics, ComponentLink7URL=https://datasheet.octopart.com/RMCF0805FT750K-Stackpole-Electronics-datasheet-141193804.pdf?src-supplier=Master+Electronics, Construction=Rectangular, JESD-609 Code=e3, Mounting Technology="Surface Mount", Packaging="Tape and Reel", Pins=2, Pricing="1=0.1, 10=0.025, 100=0.012, 1000=0.00658, 2500=0.00538 (USD)", Reach SVHC Compliant=Yes, Reference Standard=AEC-Q200, RoHS=Yes, RoHS Compliant=Yes, Stock=25527, Supplier=Digikey, Technology="METAL GLAZE/THICK FILM", Terminal Finish=Nickel, Termination=Wraparound
R16 R17 R18: "Fixed Resistor, Metal Glaze/thick Film, 0.0625W, 10000ohm, 50V, 5% +/-Tol, 100ppm/Cel, Surface Mount, 0402", Case/Package=0402, Manufacturer=Yageo, Manufacturer Part Number=RC0402JR-0710KL, Max Operating Temperature=155°C, Min Operating Temperature=-55°C, Package Height=0.35mm, Package Length=1mm, Package Shape=Rectangular, Package Width=0.5mm, Power=62.5mW, Rated Temperature=70°C, Resistor Type="FIXED RESISTOR", Supplier Part Number=4356762, Temperature Coefficient (ppm/Cel)=100, Tolerance=5%, Working Voltage=50V, Additional Feature="LASER TRIMMABLE", Category="Chip SMD Resistors", ComponentLink1Description=https://datasheet.ciiva.com:443/pdfs/VipMasterIC/IC/YAGO/YAGO-S-A0008145938/YAGO-S-A0008145938-1.pdf?src-supplier=IHS+Markit, ComponentLink1URL=https://datasheet.ciiva.com:443/pdfs/VipMasterIC/IC/YAGO/YAGO-S-A0008145938/YAGO-S-A0008145938-1.pdf?src-supplier=IHS+Markit, ComponentLink2Description=https://datasheet.ciiva.com/2452/pyu-r-int-thick-7-2452627.pdf?src-supplier=Digikey, ComponentLink2URL=https://datasheet.ciiva.com/2452/pyu-r-int-thick-7-2452627.pdf?src-supplier=Digikey, ComponentLink3Description=https://datasheet.ciiva.com/2452/pyu-r-int-thick-7-2452628.pdf?src-supplier=Digikey, ComponentLink3URL=https://datasheet.ciiva.com/2452/pyu-r-int-thick-7-2452628.pdf?src-supplier=Digikey, ComponentLink4Description=https://datasheet.ciiva.com/2452/pyu-r-int-thick-7-2452626.pdf?src-supplier=Digikey, ComponentLink4URL=https://datasheet.ciiva.com/2452/pyu-r-int-thick-7-2452626.pdf?src-supplier=Digikey, ComponentLink5Description=https://datasheet.ciiva.com/12669/pyu-rc0402-51-rohs-l-6-r-12669687.pdf?src-supplier=Mouser, ComponentLink5URL=https://datasheet.ciiva.com/12669/pyu-rc0402-51-rohs-l-6-r-12669687.pdf?src-supplier=Mouser, ComponentLink6Description=https://datasheet.ciiva.com/7850/1018594-7850137.pdf?src-supplier=Element14, ComponentLink6URL=https://datasheet.ciiva.com/7850/1018594-7850137.pdf?src-supplier=Element14, ComponentLink7Description=https://datasheet.ciiva.com/7850/1018594-7850136.pdf?src-supplier=Element14, ComponentLink7URL=https://datasheet.ciiva.com/7850/1018594-7850136.pdf?src-supplier=Element14, Construction=Chip, JESD-609 Code=e3, Mounting Technology="Surface Mount", Packaging="Tape and Reel", Pins=2, Pricing="10000=0.0003, 50000=0.0003, 200000=0.0003, 500000=0.0003, 1250000=0.0003 (USD)", Reach SVHC Compliant=Yes, RoHS=Yes, RoHS Compliant=Yes, Stock=980000, Supplier="Future Electronics", Technology="METAL GLAZE/THICK FILM", Terminal Finish=Nickel, Termination=Wraparound
U1: "Power Supply Support Circuit, Adjustable, 1 Channel, PDSO24", Manufacturer="Texas Instruments", Supplier Part Number=595-BQ7791501PWR, Category="Battery Management", ComponentLink1Description=https://www.ti.com:443/lit/ds/symlink/bq77915.pdf?src-supplier=IHS+Markit, ComponentLink1URL=https://www.ti.com:443/lit/ds/symlink/bq77915.pdf?src-supplier=IHS+Markit, ComponentLink2Description=http://www.ti.com/general/docs/suppproductinfo.tsp?distId=10&amp;gotoUrl=http%3A%2F%2Fwww.ti.com%2Flit%2Fgpn%2Fbq77915&src-supplier=Digikey, ComponentLink2URL=http://www.ti.com/general/docs/suppproductinfo.tsp?distId=10&amp;gotoUrl=http%3A%2F%2Fwww.ti.com%2Flit%2Fgpn%2Fbq77915&src-supplier=Digikey, Manufacturer Part Number=BQ7791501PWR, Pricing="1=1.62, 10=1.19, 50=1.08, 100=0.955, 1000=0.836, 10000=0.75 (USD)", RoHS=Yes, Stock=7932, Supplier=Mouser

## Via types
v1: diameter 0.6, hole 0.3, Top Layer to Bottom Layer, tented both sides, 166 vias
v2: diameter 0.6, hole 0.3, Top Layer to Bottom Layer, 26 vias

## Nets (pads, with @x,y where several pads share a name; then routed paths per layer and width w, separated by ;. In a path a pad name is that pad's centre, name@x,y a point inside that pad or via, vN(x,y) a via of type N, cw(c..) or ccw(c..) an arc to the next point about the centre after c; other vN are vias at no path point)
AVDD: C9.2 U1.2 U1.20
BATT+: C1.2 C14.2 D3.2 R1.2 R18.1 U1.3 U1.4 | length 0.7
  Top Layer w0.3: U1.3@134.489,51.606 U1.3@134.544,51.551 U1.4@134.544,50.901
  other v2: 174.523,26.035 175.92,26.06 177.114,26.06 173.279,26.086 118.008,26.111 121.006,26.137 122.022,26.137 116.662,26.187 124.333,26.187 123.19,26.213 122.022,27.28 116.662,27.305 124.308,27.305 123.165,27.33 116.662,28.499 123.114,28.499 124.282,28.499 122.022,28.524 121.971,29.743 116.662,29.769 174.701,32.639 175.87,32.639 177.013,32.639 173.634,32.664 126.06,58.344
GND: BATT-.4 C4.2 C5.1 C7.1 C8.1 C9.1 C10.1 D3.1 J1.J1_1 J4.02 R5.1 R7.1 R13.1 R15.2 U1.9 U1.16 U1.23 U1.24 | length 16.1
  Top Layer w0.4: U1.9@134.544,47.651 136.474,47.651 v1(136.5,47.625) ; v1(138.481,47.65) U1.16@140.284,47.651 ; C7.1@139.573,39.751 139.723,39.901 140.253,39.901 140.56,40.208 v1(140.614,40.208)
  Top Layer w0.5: U1.23@140.284,52.201 U1.24@140.284,52.851 140.329,52.896 140.329,53.561 140.665,53.897 v1(140.665,53.924)
  Top Layer w1.5: R13.1@131.039,31.471 131.039,32.971 135.382,37.314 R7.1@135.382,38.926
  other v1: 133.502,38.71 129.235,40.894 145.72,47.371 140.691,56.972
NetC1_1: C1.1 C2.2 R2.2 U1.5
NetC2_1: C2.1 C3.2 R3.2 U1.6
NetC3_1: C3.1 C4.1 R4.2 U1.7
NetC5_2: C5.2 R5.2 U1.8 | length 0.1
  Top Layer w0.2: U1.8@134.439,48.196 U1.8@134.544,48.301
NetC6_1: C6.1 C8.2 R7.2 U1.10
NetC6_2: C6.2 C7.2 R6.2 U1.11
NetC11_1: C11.1 Q1.S Q2.S Q3.S Q4.S Q11.S R6.1 R9.1 R13.2 | length 13.5
  Top Layer w0.4: R6.1@137.668,38.926 137.935,38.659 141.259,38.659 141.559,38.959 R9.1@141.559,39.116
  Top Layer w1.5: R6.1@137.668,38.701 137.668,37.16 139.108,35.721 139.338,35.721 142.088,32.971 R13.2@142.088,31.471
  other v1: 150.901,31.369 151.486,32.309 152.171,35.331 152.832,36.093 151.714,37.846 151.638,41.173 152.552,42.189 151.765,43.155 151.689,46.685 152.629,47.269 151.714,49.098 152.095,53.086 150.673,53.137 150.698,54.762 152.095,54.762
NetC11_2: C11.2 C12.1
NetC13_2: C13.2 C14.1 | length 1.7
  Top Layer w0.5: C14.1@175.285,35.484 C13.2@175.285,37.135
NetD1_1: D1.1 R10.2 R12.2 | length 8.4
  Top Layer w0.4: R12.2@143.429,43.18 143.429,42.97 144.704,41.695 144.704,39.05 144.938,38.816 R10.2@146.05,38.816 148.313,38.816 148.313,38.839 D1.1@148.336,38.862
NetD1_2: D1.2 D2.2 R10.1 R11.2 R24.2 R25.2 R26.2 R27.2 R28.2 | length 70.9
  Top Layer w0.5: v1(171.882,47.066) 171.902,47.087 R25.2@171.902,48.87 ; v1(171.882,52.68) 171.902,52.7 R24.2@171.902,54.508 ; R28.2@171.902,32.08 171.905,32.078 v1(171.905,30.584) ; R27.2@171.928,37.719 v1(171.928,35.793) v1@171.958,35.763 ; v1@171.933,41.554 171.933,43.251 R26.2@171.902,43.282 R26.2@172.152,43.532
  Bottom Layer w0.5: v1(147.168,42.494) 148.387,43.713 148.387,53.873 150.597,56.083 171.614,56.083 171.907,55.79 171.907,54.502 171.882,54.477 v1(171.882,52.68) v1(171.882,47.066) 171.894,47.053 171.894,41.338 v1(171.907,41.326) 171.917,41.316 171.917,35.804 v1(171.928,35.793) 171.916,35.782 171.916,30.595 v1(171.905,30.584)
NetJ1_2: J1.J1_2 R4.1
NetJ1_3: J1.J1_3 R3.1
NetJ1_4: J1.J1_4 R2.1
NetJ1_5: J1.J1_5 R1.1
NetQ1_D: Q1.9 Q1.D Q2.9 Q2.D Q3.9 Q3.D Q4.9 Q4.D Q5.9 Q5.D Q6.9 Q6.D Q7.9 Q7.D Q8.9 Q8.D Q9.9 Q9.D Q11.9 Q11.D
  other v1: 155.524,31.801 156.87,31.801 158.217,31.801 163.805,31.928 165.151,31.928 166.497,31.928 161.696,32.055 160.68,33.02 161.773,33.934 164.109,34.341 165.532,34.366 166.853,34.366 155.727,34.468 157.15,34.493 158.471,34.493 160.706,35.306 166.853,35.839 164.084,35.865 165.481,35.865 158.471,35.966 155.702,35.992 157.099,35.992 161.747,36.474 164.084,37.338 165.43,37.338 166.776,37.338 155.702,37.465 157.048,37.465 158.394,37.465 160.706,37.744 161.773,39.446 155.651,40.03 157.074,40.056 158.394,40.056 164.135,40.195 165.557,40.221 166.878,40.221 160.655,40.945 158.394,41.529 155.626,41.554 157.023,41.554 164.109,41.719 165.506,41.719 166.878,41.694 161.798,42.139 155.626,43.028 156.972,43.028 158.318,43.028 164.109,43.193 165.456,43.193 166.802,43.193 160.731,43.434 161.798,44.272 160.706,45.212 164.211,45.568 165.633,45.593 166.954,45.593 155.626,45.72 157.048,45.745 158.369,45.745 161.646,46.431 166.954,47.066 164.186,47.092 165.583,47.092 158.369,47.219 155.6,47.244 156.997,47.244 160.782,47.752 164.186,48.565 165.532,48.565 166.878,48.565 155.6,48.717 156.947,48.717 158.293,48.717 161.671,48.92 160.731,49.809 161.722,50.724 155.575,51.079 164.084,51.079 156.997,51.105 158.318,51.105 165.506,51.105 166.827,51.105 160.757,52.07 158.318,52.578 166.827,52.578 155.55,52.603 156.947,52.603 164.059,52.603 165.456,52.603 161.747,53.315 155.55,54.077 156.896,54.077 158.242,54.077 164.059,54.077 165.405,54.077 166.751,54.077 160.807,54.458
NetQ1_G: Q1.G R19.2 | length 2
  Top Layer w0.4: R19.2@152.141,50.724 152.173,50.756 154.037,50.756 Q1.G@154.069,50.788
NetQ2_G: Q2.G R20.2 | length 1.8
  Top Layer w0.4: R20.2@152.294,45.187 152.313,45.206 154.032,45.206 Q2.G@154.051,45.225
NetQ3_G: Q3.G R21.2 | length 1.8
  Top Layer w0.4: R21.2@152.243,39.624 152.255,39.612 154.039,39.612 Q3.G@154.051,39.599
NetQ4_G: Q4.G R22.2 | length 1.9
  Top Layer w0.4: R22.2@152.141,34.036 152.147,34.03 154.062,34.03 Q4.G@154.069,34.024
NetQ5_G: Q5.G R27.1 | length 1.7
  Top Layer w0.4: Q5.G@168.39,37.725 R27.1@170.052,37.725
  Top Layer w0.5: Q5.G@168.384,37.731 Q5.G@168.39,37.725 ; R27.1@170.052,37.725 R27.1@170.058,37.719
NetQ6_G: Q6.G R26.1 | length 1.7
  Top Layer w0.4: Q6.G@168.384,43.319 168.403,43.301 170.013,43.301 R26.1@170.032,43.282
NetQ7_G: Q7.G R25.1 | length 1.7
  Top Layer w0.4: Q7.G@168.384,48.907 168.403,48.889 170.013,48.889 R25.1@170.032,48.87
NetQ8_G: Q8.G R24.1 | length 1.7
  Top Layer w0.4: Q8.G@168.384,54.495 168.391,54.502 170.026,54.502 R24.1@170.032,54.508
NetQ9_G: Q9.G R28.1 | length 1.7
  Top Layer w0.4: Q9.G@168.384,32.143 168.416,32.112 170.001,32.112 R28.1@170.032,32.08
NetQ11_G: Q11.G R23.2 | length 1.8
  Top Layer w0.4: R23.2@152.243,28.448 152.249,28.442 154.062,28.442 Q11.G@154.069,28.436
NetR8_1: R8.1 R9.2 R19.1 R20.1 R21.1 R22.1 R23.1 | length 37.7
  Top Layer w0.5: R8.1@143.429,41.148 R9.2@143.429,39.116 143.429,38.906 144.591,37.744 v1(150.343,37.744) 150.347,37.749 R21.1@150.347,39.472 ; R22.1@149.992,33.985 149.992,32.126 v1(150.012,32.106) 150.012,32.079 150.068,32.023 R23.1@150.068,28.296 ; v1(150.419,49.327) 150.449,49.357 R19.1@150.449,50.8 R19.1@150.436,50.787 ; R20.1@150.424,45.187 150.424,43.556 v1(150.444,43.536)
  Bottom Layer w0.5: v1(150.012,32.106) 150.012,32.133 150.343,32.463 150.343,37.771 150.444,37.873 v1(150.444,43.536) 150.431,43.548 150.431,49.314 v1(150.419,49.327)
NetR8_2: R8.2 U1.12 | length 9
  Top Layer w0.4: U1.12@134.544,45.701 135.934,45.701 v1(135.966,45.669) ; v1(140.132,42.113) 140.186,42.113 140.641,41.658 141.259,41.658 141.559,41.358 R8.2@141.559,41.148
  Bottom Layer w0.4: v1(135.966,45.669) 139.484,42.151 140.094,42.151 v1(140.132,42.113)
NetR12_1: R12.1 U1.13 | length 3
  Top Layer w0.4: U1.13@140.284,45.701 140.284,44.665 141.559,43.39 R12.1@141.559,43.18
NetR14_2: R14.2 U1.14 | length 2.6
  Top Layer w0.4: U1.14@140.284,46.351 140.289,46.346 141.524,46.346 142.321,45.549 R14.2@142.321,45.339
NetR15_1: R15.1 U1.17 | length 2.5
  Top Layer w0.4: U1.17@140.284,48.301 140.289,48.296 141.606,48.296 142.321,47.581 R15.1@142.321,47.371
NetR16_1: R16.1 U1.22 | length 2.9
  Top Layer w0.4: U1.22@140.284,51.551 140.289,51.556 140.966,51.556 140.972,51.562 141.427,51.562 141.894,52.029 141.894,52.659 R16.1@142.194,52.959
NetR17_1: R17.1 U1.18 | length 3
  Top Layer w0.4: U1.18@140.284,48.951 R17.1@142.64,48.951
  Top Layer w0.5: R17.1@142.64,48.951 142.919,49.23 R17.1@143.129,49.23
PACK-: C12.2 C13.1 D2.1 PACK-.4 Q5.S Q6.S Q7.S Q8.S Q9.S R11.1 R14.1 | length 30.7
  Top Layer w0.5: D2.1@148.311,47.164 D2.1@148.336,47.164
  Top Layer w0.8: D2.1@148.336,47.164 v1(148.336,56.667)
  Bottom Layer w0.8: v1(148.336,56.667) 149.416,57.748 168.084,57.748 v1(168.758,57.074)
  other v1: 170.028,33.604 170.815,34.849 169.824,36.119 170.078,39.192 170.84,40.335 170.028,41.681 170.256,44.602 170.917,45.923 170.002,47.219 174.092,47.447 175.514,47.473 176.835,47.473 176.835,48.946 174.066,48.971 175.463,48.971 170.002,50.343 174.066,50.444 175.412,50.444 176.759,50.444 170.942,51.613 174.066,52.121 175.489,52.146 176.809,52.146 169.901,52.984 176.809,53.619 174.041,53.645 175.438,53.645 174.041,55.118 175.387,55.118 176.733,55.118
TH1: J4.01 R17.2 U1.19
VDD: C10.2 R16.2 R18.2 U1.1 | length 10.7
  Top Layer w0.4: v1(143.129,54.178) 143.167,54.14 v1@143.167,54.066 ; R16.2@144.064,52.959 R16.2@144.064,53.169
  Top Layer w0.5: v1@143.167,54.066 R16.2@144.064,53.169
  Bottom Layer w0.6: v2(134.645,54.458) 136.22,54.458 136.855,55.093 142.215,55.093 v1(143.129,54.178)
pads on no net: BATT+.BATT+ PACK+.BATT+ U1.15 U1.21

## Polygon pours and split planes (outlines as drawn)
GND on Top Layer "GND_L01_P013" (solid, pour order 13): 126.378,27.775 ccw(c128.295,27.775) 128.295,25.857 131.572,25.857 131.572,36.449 127.254,36.449 cw(c127.254,37.541) 126.162,37.541 126.162,40.411 125.679,40.894 116.967,40.894 ccw(c116.967,40.097) 116.403,40.661 116.394,40.651 ccw(c117.218,39.827) 116.053,39.827 116.053,34.341 ccw(c117.831,34.341) 116.573,33.083 116.599,33.058 ccw(c117.427,33.886) 117.427,32.715 126.34,32.715 126.34,27.813
NetC11_1 on Top Layer "NETC11_1_L01_P010" (solid, pour order 10): 149.606,56.617 cw(c150.52,56.617) 150.52,57.531 157.658,57.531 cw(c157.658,57.506) 157.683,57.506 157.683,56.083 cw(c157.582,56.083) 157.582,55.982 155.296,55.982 ccw(c155.296,55.397) 154.711,55.397 154.711,25.984 154.559,25.832 142.316,25.832 142.316,36.322 142.342,36.347 149.606,36.347
PACK- on Top Layer "PACK-_L01_P009" (solid, pour order 9): 173.457,55.829 173.367,55.918 ccw(c172.847,55.398) 172.847,56.134 164.694,56.134 164.694,57.48 176.632,57.48 cw(c176.632,56.693) 177.419,56.693 177.419,35.179 177.14,34.9 174.295,34.9 172.517,33.122 172.517,25.679 167.64,25.679 167.64,53.721 173.33,53.721 ccw(c173.33,53.848) 173.457,53.848
GND on Top Layer "GND_L01_P035" (solid, pour order 35): 116.952,44.512 cw(c117.013,44.45) 117.013,44.537 125.791,44.537 cw(c125.791,43.801) 126.311,44.322 126.35,44.283 126.35,43.398 cw(c125.483,43.398) 126.096,42.784 cw(c125.973,42.907) 125.973,42.734 116.977,42.734 116.977,44.552 ccw(c116.891,44.552) 116.952,44.613
NetJ1_2 on Top Layer "NETJ1_2_L01_P031" (solid, pour order 31): 116.916,47.168 cw(c116.978,47.106) 116.978,47.193 125.755,47.193 cw(c125.755,46.457) 126.276,46.978 126.314,46.939 126.314,46.054 cw(c125.447,46.054) 126.06,45.441 cw(c125.938,45.563) 125.938,45.39 116.942,45.39 116.942,47.208 ccw(c116.855,47.208) 116.916,47.269
NetJ1_3 on Top Layer "NETJ1_3_L01_P030" (solid, pour order 30): 116.942,49.632 cw(c117.003,49.57) 117.003,49.657 125.779,49.657 cw(c125.781,48.921) 126.301,49.441 126.34,49.403 126.34,48.518 cw(c125.472,48.518) 126.086,47.904 cw(c125.963,48.027) 125.963,47.854 116.967,47.854 116.967,49.672 ccw(c116.88,49.672) 116.942,49.733